# Altium PCB Prog_Adaptor.PcbDoc
Units mm, origin at the board's own origin, x right, y up, seen from the top; angles counter-clockwise.
Board outline 43.31 x 26.95 mm, 2 copper layers (Top Layer, Bottom Layer), stack 1.591 mm thick; 8 components, 10 nets, 61 pads, 28 vias.
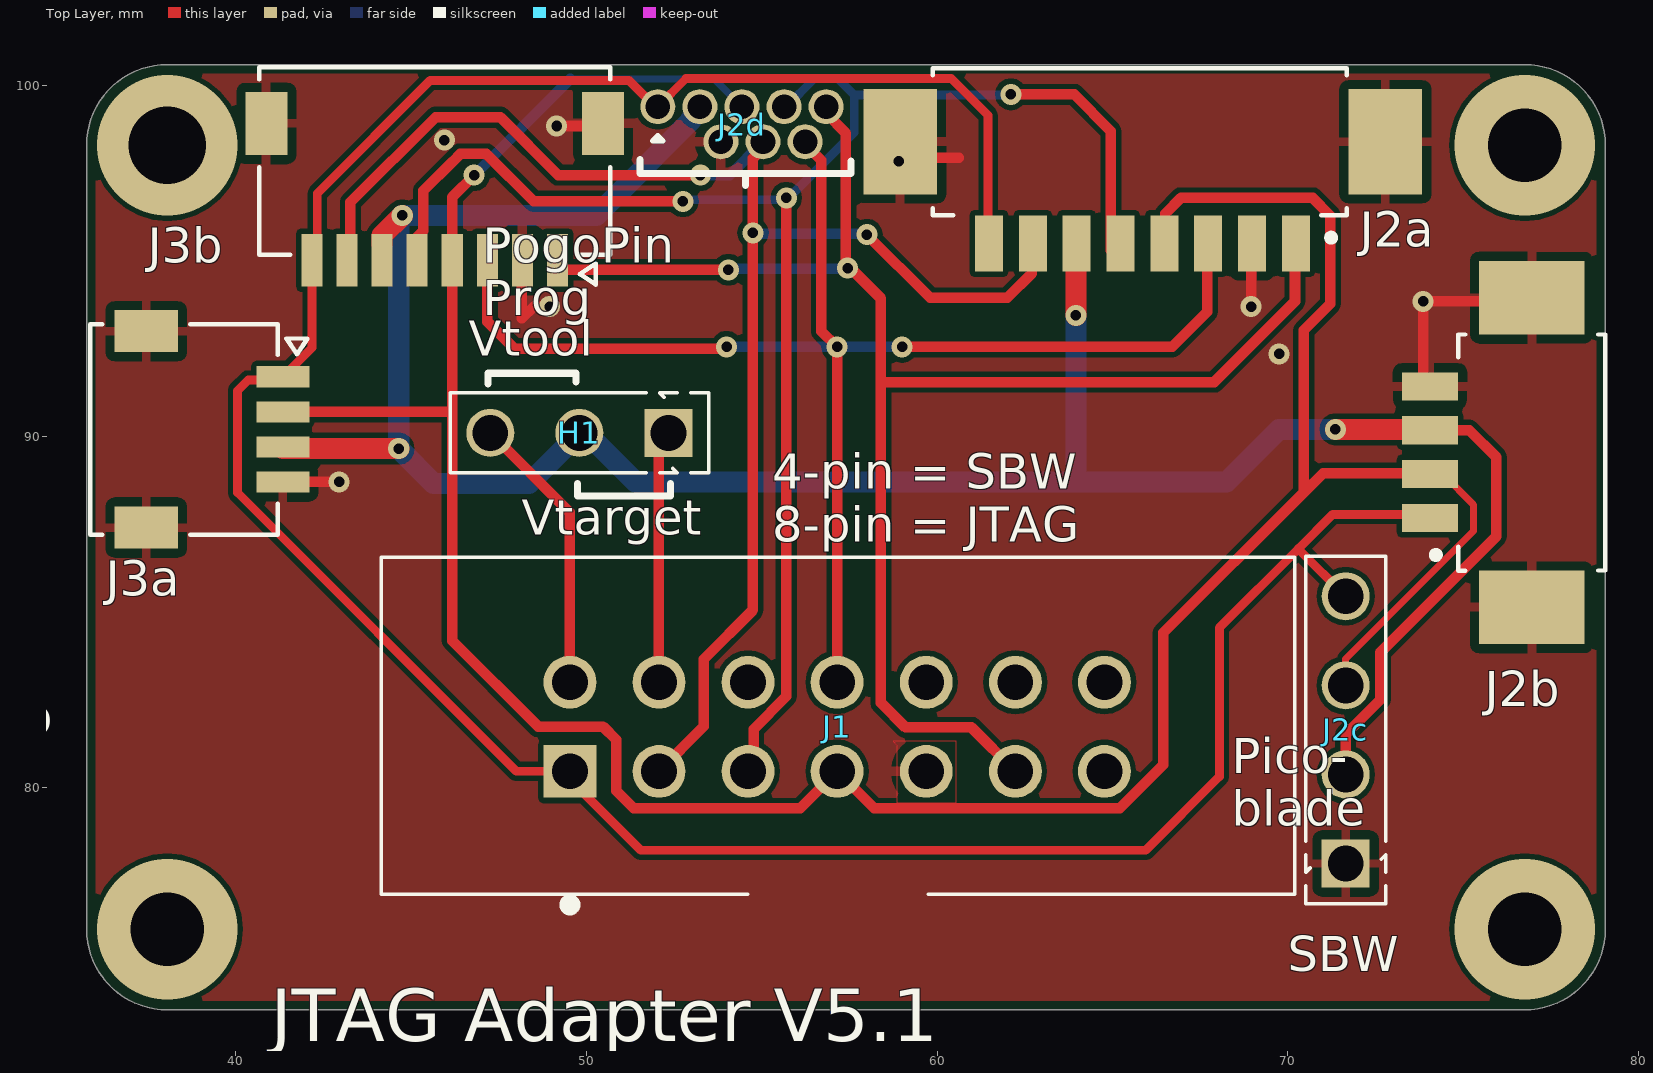
[diagram p0: Top Layer view]
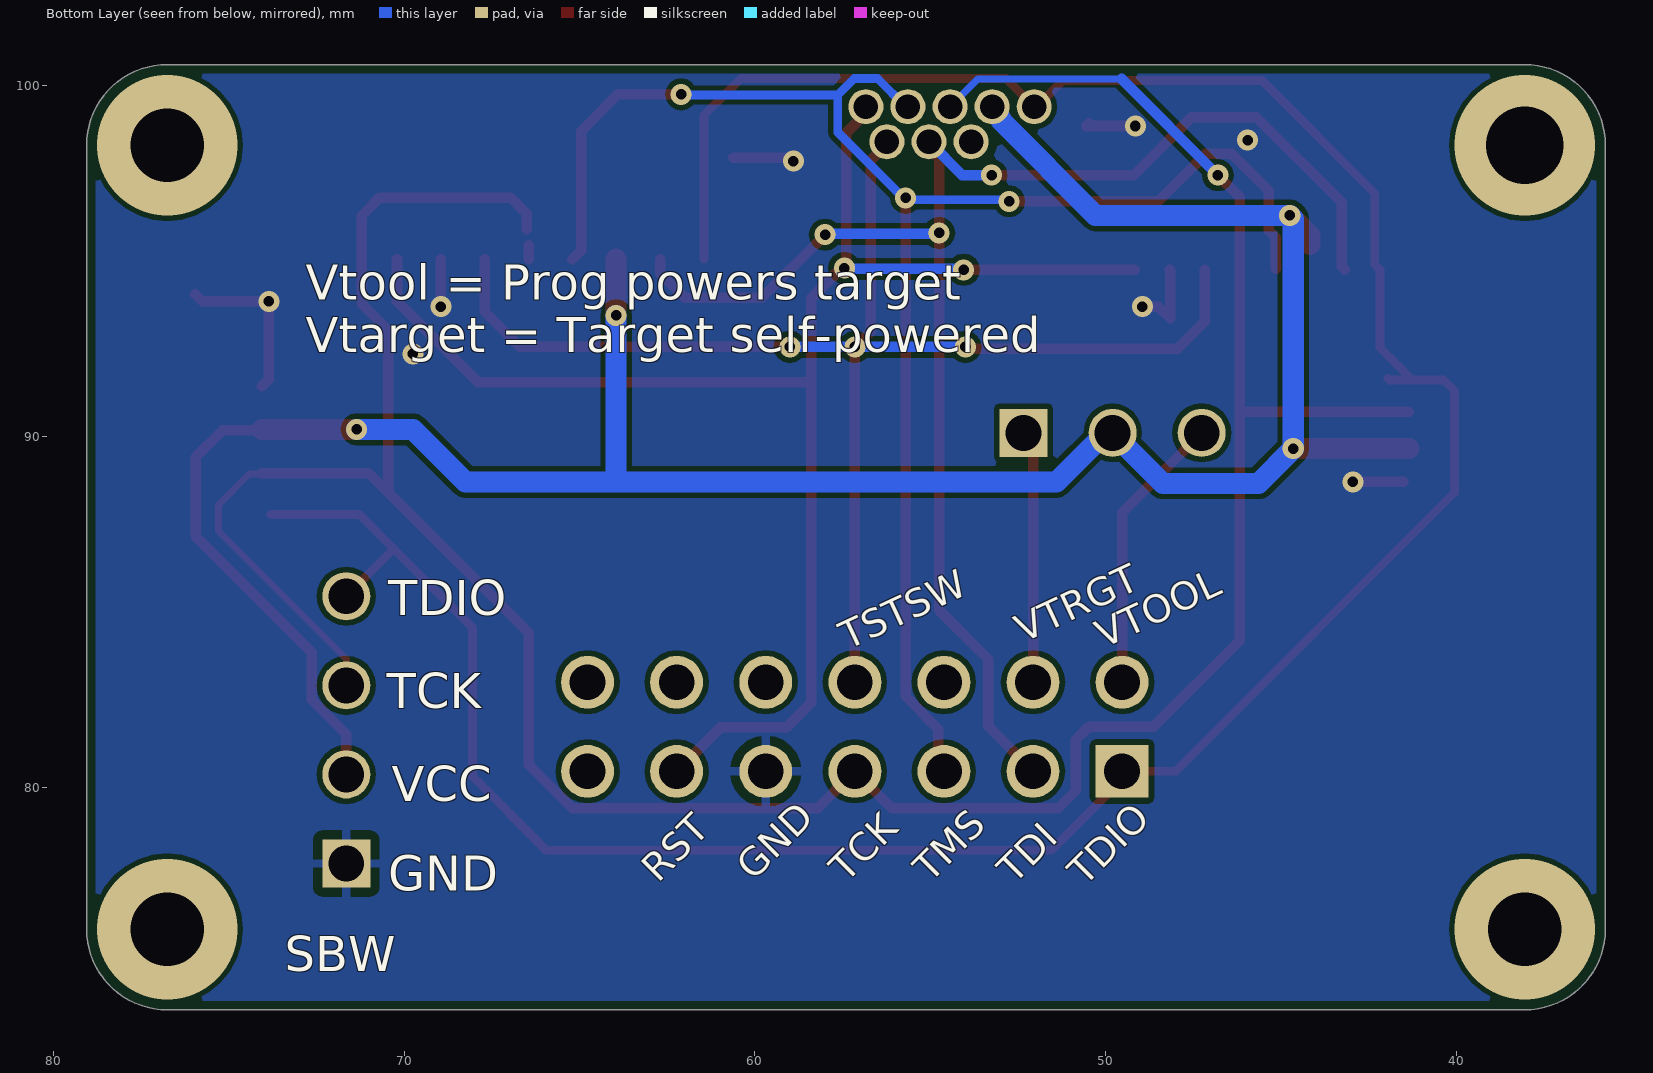
[diagram p1: Bottom Layer view, seen from below]
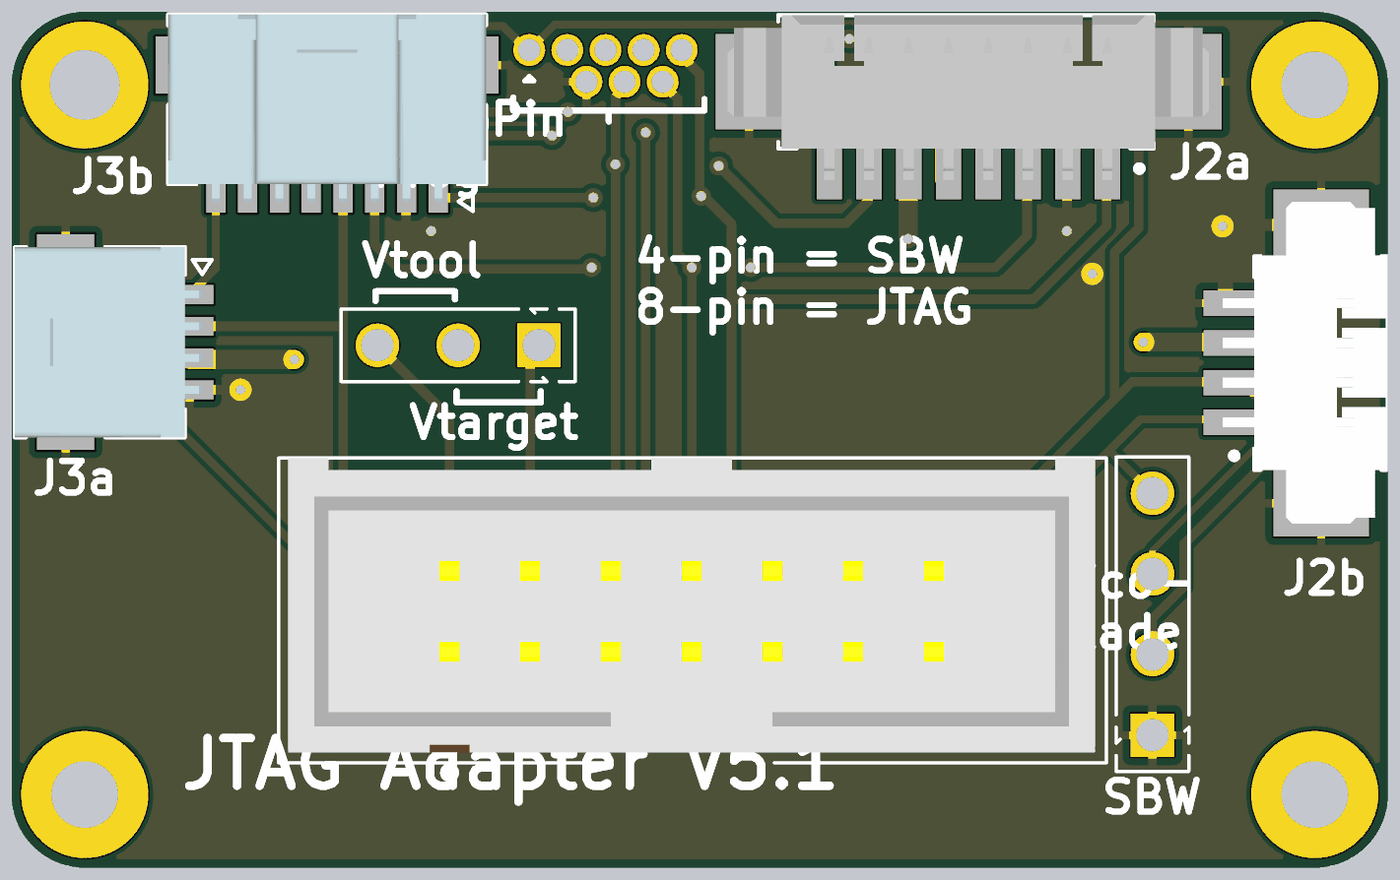
[diagram p2: 3D render of the assembled board from above, using the file's embedded part models]

## Layer stack, top to bottom
Top Solder: solder mask 0.0102, Solder Resist, Dk 3.5
Top Layer: signal copper 0.0356
Dielectric 1: dielectric 1.52, FR-4, Dk 4.8
Bottom Layer: signal copper 0.0356
Bottom Solder: solder mask 0.0102, Solder Resist, Dk 3.5

## Board outline
35.749,75.95 35.749,98.3 cw(c38.05,98.3) 38.05,100.601 76.755,100.601 cw(c76.755,98.3) 79.056,98.3 79.056,75.95 cw(c76.755,75.95) 76.755,73.649 38.05,73.649 cw(c38.05,75.95)

## Design rules (kind name [scope] priority, off if disabled: settings)
BoardOutlineClearance [All] p1: gap=0.254 ignorepadtopadclearanceinfootprint=FALSE except(0: Arc-SplitContinuation Track-SplitContinuation SMDPad-SplitContinuation THPad-SplitContinuation Via-SplitContinuation Fill-SplitContinuation Poly-SplitContinuation Region-SplitContinuation Text-SplitContinuation)
Clearance [All] p1: gap=0.152 ignorepadtopadclearanceinfootprint=FALSE except(0: Arc-Hole Track-Hole SMDPad-Hole THPad-Hole Via-Hole Fill-Hole Poly-Hole Region-Hole Text-Hole; 0.127: THPad-THPad Via-Via)
HoleSize [All] p1: absolutevalues=TRUE maxlimit=6.2 minlimit=0.3 maxpercent=80.000 minpercent=20.000
MinimumAnnularRing [All] p1: minimumring=0.15
MinimumSolderMaskSliver [All] p1: minsoldermaskwidth=0.1
PolygonConnect ViaConnect [IsVia] p1: connectstyle=Direct reliefconductorwidth=0.254 reliefentries=4 polygonreliefangle="90 Angle" airgapwidth=0.254
PolygonConnect [All] p2: connectstyle=Relief reliefconductorwidth=0.254 reliefentries=4 polygonreliefangle="90 Angle" airgapwidth=0.254
RoutingVias [All] p1: holewidth=0.3 width=0.6 viastyle="Through Hole" minholewidth=0.3 minwidth=0.5 maxholewidth=1 maxwidth=5
SilkToSilkClearance [All] p1: silktosilkclearance=0.1
SilkToSolderMaskClearance [IsPad] p1: minsilkscreentomaskgap=0.1 clearancetoexposedcopper=TRUE
SolderMaskExpansion [All] p1: expansion=0.051
SupplyNets "Schematic Supply Nets_1" [InNet('GND')] p1: voltage=0.000
SupplyNets "Schematic Supply Nets" [InNet('3v3')] p2: voltage=0.000
Width [All] p1: maxlimit=25.4 minlimit=0.15 preferedwidth=0.3
26 further rules are at their usual default settings.

## Components (designator, comment, footprint, x,y, rotation, side; value= is the part's Value field where it differs from the comment)
H1 "HDR,2.54mm,1x3" HEADER_2.54MM_1x3PIN 49.8,90.1 r180 top
J1 "SBH11-PBPC-D07-ST-BK" SBH11-PBPC-D07-ST-BK 57.15,81.72 r0 top
J2a "0532610871" MOLEX_0532610871 65.855,98.4 r180 top
J2b "0532610471" MOLEX_0532610471 76.955,89.55 r90 top
J2c "HDR,2.54mm,1x4" HEADER_2.54MM_1x4PIN 71.65,81.63 r90 top
J2d "Headerless Pogo Holes 8-pin" POGO_8_PIN_HEADER 54.436,98.9 r0 top
J3a "5015680407" MOLEX_5015680407 38.8,90.2 r270 top
J3b "5015680807" MOLEX_5015680807 45.675,97.575 r180 top

## Footprints (in the part's own frame and the unit in brackets; to place one, negate y for a bottom-side part, rotate by r counter-clockwise, add the part's x,y. Pads: shape width x height; smd on the part's side, far side on the other; paste and mask are expansions set on the pad)
HEADER_2.54MM_1x3PIN [mm]
  rect 1.37x1.37 hole 1.02: 1(-2.54,0)
  round 1.37 hole 1.02: 2(0,0) 3(2.54,0)
  silkscreen extent -3.68,-1.14 3.68,1.14, body extent -3.68,-1.14 3.68,1.14, height 8.2
HEADER_2.54MM_1x4PIN [mm]
  rect 1.37x1.37 hole 1.02: 1(-3.81,0)
  round 1.37 hole 1.02: 2(-1.27,0) 3(1.27,0) 4(3.81,0)
  silkscreen extent -4.95,-1.14 4.95,1.14, body extent -4.95,-1.14 4.95,1.14, height 8.2
MOLEX_0532610471 [mm] "Header - Picoblade 04-pin, SMT, RA, 3.4mm height"
  rect 0.8x1.6 smd mask+0.051: 1(-1.875,2.9) 2(-0.625,2.9) 3(0.625,2.9) 4(1.875,2.9)
  rect 2.1x3 smd mask+0.051: MP1(-4.425,0) MP2(4.405,0)
  silkscreen extent -3.38,-2.1 3.35,2.83, body extent -5.07,-2.1 5.07,3.1, height 3.4
MOLEX_0532610871 [mm] "Header - Picoblade 08-pin, SMT, RA, 3.4mm height"
  rect 0.8x1.6 smd mask+0.051: 1(-4.375,2.9) 2(-3.125,2.9) 3(-1.875,2.9) 4(-0.625,2.9) 5(0.625,2.9) 6(1.875,2.9) 7(3.125,2.9) 8(4.375,2.9)
  rect 2.1x3 smd mask+0.051: MP1(-6.925,0) MP2(6.905,0)
  silkscreen extent -5.83,-2.1 5.98,2.83, body extent -7.57,-2.1 7.58,3.1, height 3.42
MOLEX_5015680407 [mm] "Header - Picoclasp 04-pin, SMT, RA, 3.2mm height"
  rect 0.6x1.5 smd mask+0.076: 1(-1.5,2.55) 2(-0.5,2.55) 3(0.5,2.55) 4(1.5,2.55)
  rect 1.2x1.8 smd mask+0.076: MP1(2.8,-1.35) MP2(-2.8,-1.35)
  silkscreen extent -3,-2.95 3,3.25, body extent -3,-2.95 3,2.95, height 3.19
MOLEX_5015680807 [mm] "Header - Picoclasp 08-pin, SMT, RA, 4.75mm height"
  rect 0.6x1.5 smd mask+0.076: 1(-3.5,2.55) 2(-2.5,2.55) 3(-1.5,2.55) 4(-0.5,2.55) 5(0.5,2.55) 6(1.5,2.55) 7(2.5,2.55) 8(3.5,2.55)
  rect 1.2x1.8 smd mask+0.076: MP1(4.8,-1.35) MP2(-4.8,-1.35)
  silkscreen extent -5,-2.95 5,3.25, body extent -5,-2.95 5,2.95, height 4.71
POGO_8_PIN_HEADER [mm] "8-pin header for pogo pins"
  round 1 hole 0.7 mask+0.051: 1(-2.4,0.5) 2(-1.2,0.5) 3(-0.6,-0.5) 4(0,0.5) 5(0.6,-0.5) 6(1.2,0.5) 7(1.8,-0.5) 8(2.4,0.5)
  silkscreen extent -2.55,-0.47 -2.25,-0.32
SBH11-PBPC-D07-ST-BK [mm]
  rect 1.508x1.508 hole 1.02: 01(-7.62,-1.27)
  round 1.508 hole 1.02: 02(-7.62,1.27) 03(-5.08,-1.27) 04(-5.08,1.27) 05(-2.54,-1.27) 06(-2.54,1.27) 07(0,-1.27) 08(0,1.27) 09(2.54,-1.27) 10(2.54,1.27) 11(5.08,-1.27) 12(5.08,1.27) 13(7.62,-1.27) 14(7.62,1.27)
  silkscreen extent -7.72,-5.18 -7.52,-4.98, body extent -12.7,-4.44 12.7,4.83, height 8.89

## Part data
H1: "Connector - 2.54mm, 1x3-pin"
J1: "14-pin JTAG Male Header"
J2a: "Header - Picoblade 08-pin, SMT, RA", Supplier 1 Part No.=WM7626CT-ND, MF Part No.=0532610871, Mounting Type="Surface Mount", Orientation="Right Angle", Pins=8, Pitch=1.25mm, Supplier 1=Digikey
J2b: "Header - Picoblade 04-pin, SMT, RA", Supplier 1 Part No.=WM7622CT-ND, MF Part No.=0532610471, Mounting Type="Surface Mount", Orientation="Right Angle", Pins=4, Pitch=1.25mm, Supplier 1=Digikey
J2c: "Connector - 2.54mm, 1x4-pin"
J2d: "Connector - Pogo pin pads, JTAG"
J3a: "Connector - Picoclasp  04-pin, SMT, RA", Supplier 1 Part No.=WM7895CT-ND, APSS Standard Part="APSS Standard", MF Part No.=5015680407, Mounting Type="Surface Mount", Orientation=Straight, Pins=4, Pitch=1mm, Supplier 1=Digikey
J3b: "Connector - Picoclasp  08-pin, SMT, RA", APSS Standard Part="APSS Standard", MF Part No.=5015680807, Mounting Type="Surface Mount", Orientation=Straight, Pins=8, Pitch=1mm, Supplier 1=Digikey

## Via types
v1: diameter 0.6, hole 0.3, Top Layer to Bottom Layer, tented both sides, 14 vias
v2: diameter 0.6, hole 0.3, Top Layer to Bottom Layer, 10 vias
v3: diameter 4, hole 2.1, Top Layer to Bottom Layer, 3 vias
v4: diameter 4, hole 2.2, Top Layer to Bottom Layer, 1 vias

## Nets (pads, with @x,y where several pads share a name; then routed paths per layer and width w, separated by ;. In a path a pad name is that pad's centre, name@x,y a point inside that pad or via, vN(x,y) a via of type N, cw(c..) or ccw(c..) an arc to the next point about the centre after c; other vN are vias at no path point)
3v3: H1.2 J2a.6 J2b.3 J2c.2 J2d.2 J3a.3 J3b.6 | length 73
  Top Layer w0.3: J2c.2 71.65,81.504 72.637,82.491 72.637,83.837 75.95,87.15 75.95,89.4 75.175,90.175 J2b.3
  Top Layer w0.6: J3a.3@41.35,89.65 v2(44.65,89.65) ; J3b.6@44.175,95.475 44.175,95.725 v2(44.75,96.3) ; v1(63.955,93.45) J2a.6@63.955,95.05 ; v2(71.355,90.2) J2b.3@74.055,90.2
  Bottom Layer w0.6: H1.2 48.363,88.663 45.637,88.663 v2(44.65,89.65) 44.65,96.2 v2(44.75,96.3) 50.283,96.3 52.988,99.006 52.988,99.044 53.236,99.292 J2d.2 ; H1.2@50.3,89.8 51.4,88.7 65.65,88.7 ; v1(63.955,93.45) 63.955,88.7 68.255,88.7 69.755,90.2 v2(71.355,90.2)
GND: J1.09 J2a.2 J2a.MP1 J2a.MP2 J2b.4 J2b.MP1 J2b.MP2 J2c.1 J2d.3 J3a.4 J3a.MP1 J3a.MP2 J3b.2 J3b.MP1 J3b.MP2 | length 13.1
  Top Layer w0.3: J3a.4@41.511,88.7 v2(42.95,88.7) ; J3b.2@48.175,94.75 48.162,94.737 48.162,93.363 48.5,93.7 v1(48.95,93.7) ; v2(49.15,98.85) 50.55,98.85 J3b.MP2 ; v2(58.9,97.85) 58.981,97.85 59.081,97.95 60.62,97.95 ; v1(68.955,93.7) J2a.2@68.955,95.05 ; J2b.4 73.855,91.625 v2(73.855,93.85) 75.75,93.85 J2b.MP2@75.955,94.055
  other v2: 69.755,92.35 45.95,98.45
JTAG_TCK/SBW_TCK: J1.07 J2a.4 J2b.2 J2c.3 J2d.4 J3a.2 J3b.4 | length 88.3
  Top Layer w0.2: J2c.3 71.65,83.65 75.3,87.3 75.3,88.05 74.425,88.925 J2b.2
  Top Layer w0.3: J3a.2 46.125,90.7 46.175,90.65 ; J3b.4 46.175,96.825 v2(46.8,97.45) ; J3b.4@46.175,95.503 46.175,90.65 ; J2d.4@54.436,99.26 J2d.4 ; J2a.4@66.455,95.05 J2a.4@66.455,95.45 ; J2a.4@66.505,95.9 66.505,96.35 66.955,96.8 70.705,96.8 71.216,96.289 71.216,93.785 70.455,93.024 70.455,88.4 ; J2b.2@74.055,88.95 71.005,88.95 70.455,88.4 ; 46.175,90.65 46.175,84.175 48.623,81.727 50.473,81.727 50.85,81.35 50.85,79.9 51.356,79.394 56.094,79.394 J1.07 58.206,79.394 65.208,79.394 66.45,80.636 66.45,84.395 70.455,88.4
  Bottom Layer w0.2: 49.547,100.197 53.639,100.197 J2d.4
  Bottom Layer w0.3: v2(46.8,97.45) 49.547,100.197
JTAG_TDI: J1.03 J2a.7 J2d.5 J3b.7 | length 44.4
  Top Layer w0.3: J3b.7@43.175,94.75 43.27,94.845 43.27,96.67 45.7,99.1 47.55,99.1 49.2,97.45 v1(53.25,97.45) v1@53.248,97.448 ; J1.03 53.35,81.73 53.35,83.65 54.75,85.05 v1(54.75,95.8) 54.75,97.925 55.036,98.211 J2d.5 ; v1(58,95.75) 59.802,93.948 62.003,93.948 62.705,94.65 J2a.7@62.705,95.05
  Bottom Layer w0.3: v1(53.25,97.45) 54.086,97.45 J2d.5 ; v1(54.75,95.8) 54.775,95.775 57.975,95.775 v1(58,95.75)
JTAG_TDO/SBW_TDIO: J1.01 J2a.8 J2b.1 J2c.4 J2d.1 J3a.1 J3b.8 | length 82.8
  Top Layer w0.25: J3a.1 42.175,92.525 42.175,94.75 42.325,94.9 42.325,96.925 45.55,100.15 51.213,100.15 51.963,99.4 J2d.1 52.838,100.202 60.403,100.202 61.455,99.15 J2a.8@61.455,95.05 ; J3a.1@41.95,91.65 41.907,91.607 40.357,91.607 40.05,91.3 40.05,88.4 48,80.45 J1.01 49.415,80.335 51.55,78.2 65.95,78.2 68.05,80.3 68.05,84.545 70.305,86.8 ; J2c.4 70.305,86.785 70.305,86.8 ; J2b.1@73.805,87.775 71.28,87.775 70.305,86.8
JTAG_TEST: J1.08 J2a.3 J2d.7 J3b.3 | length 40
  Top Layer w0.3: J3b.3@47.175,94.75 47.175,93.275 47.95,92.5 53.95,92.5 v1(54,92.55) ; J2d.7 56.236,98.338 56.7,97.874 56.7,93 v1(57.15,92.55) J1.08 ; v1(59.002,92.55) 66.705,92.55 67.705,93.55 J2a.3@67.705,95.05
  Bottom Layer w0.3: v1(54,92.55) v1(57.15,92.55) v1(59.002,92.55)
JTAG_TMS: J1.05 J2a.5 J2d.6 J3b.5 | length 48.3
  Top Layer w0.3: J3b.5@45.151,94.774 45.151,95.663 45.352,95.865 45.352,97.002 46.198,97.848 46.2,97.848 46.404,98.052 47.148,98.052 48.498,96.702 v1(52.75,96.702) ; J1.05 54.768,80.608 54.768,81.654 55.7,82.586 v1(55.7,96.8) ; v1(62.105,99.75) 63.905,99.75 64.955,98.7 64.955,95.3 J2a.5@65.205,95.05
  Bottom Layer w0.25: v1(52.75,96.702) 52.798,96.75 55.65,96.75 v1(55.7,96.8) 55.771,96.8 57.638,98.668 57.638,99.732 ; J2d.6 55.701,99.4 56.504,100.202 57.168,100.202 57.638,99.732 ; v1(62.105,99.75) 62.087,99.732 57.638,99.732
Reset: J1.11 J2a.1 J2d.8 J3b.1 | length 44.6
  Top Layer w0.3: J3b.1@49.175,94.75 v1(54.05,94.75) ; J2d.8 56.836,99.211 57.398,98.649 57.398,94.852 v1(57.45,94.8) 57.531,94.8 58.4,93.931 58.4,91.55 ; J1.11 60.98,81.7 59.1,81.7 58.4,82.4 58.4,91.55 ; J2a.1@70.205,95.05 70.205,93.85 67.905,91.55 58.4,91.55
  Bottom Layer w0.3: v1(54.05,94.75) 54.075,94.775 57.425,94.775 v1(57.45,94.8)
VccTarget: H1.1 J1.04 | length 7.2
  Top Layer w0.3: J1.04 52.07,89.83 H1.1
VccTool: H1.3 J1.02 | length 8.1
  Top Layer w0.3: H1.3 49.53,87.83 J1.02
pads on no net: J1.06 J1.10 J1.12 J1.13 J1.14
copper on no net:
  other v3: 38.05,75.95 76.755,75.95 76.755,98.3
  other v4: 38.05,98.3

## Polygon pours and split planes (outlines as drawn)
GND on Top Layer "GND" (solid, remove dead copper, pour order 4): 35.749,100.599 35.749,73.6 79.056,73.6 79.056,100.6
GND on Top Layer "GND_L01_P000" (solid, pour order 0): 60.55,79.55 60.55,81.3 58.75,81.3 58.85,81.2 58.85,79.55
GND on Bottom Layer "GND" (solid, remove dead copper, pour order 8): 34.946,100.6 34.946,73.6 80.8,73.6 80.8,100.6

## Silkscreen, mask and mechanical layers (free items; w line width, h text height)
Top Overlay:
  lines w0.1: 54.6,76.95 54.3,76.95 44.15,76.95 44.15,86.55 70.2,86.55 70.2,76.95 59.75,76.95
  lines w0.2: 47.2,91.5 47.2,91.8 49.7,91.8 49.7,91.55 ; 49.75,88.65 49.75,88.3 52.4,88.3 52.4,88.65 ; 51.533,97.9 51.533,97.5 57.55,97.5 57.55,97.85 ; 54.541,97.15 54.541,97.5
  text "PogoPin  / Prog" at 47.05,93.45 h1
  text "Vtool" at 46.65,92.3 h1
  text "Vtarget" at 48.15,87.2 h1
  text "4-pin = SBW / 8-pin = JTAG" at 55.3,87 h1
  text "Pico- / clasp" at 31.2,81.5 h1
  text "Pico- / blade" at 68.4,78.9 h1
  text "SBW" at 70,74.75 h1
  text "JTAG Adapter V5.1" at 41,72.75 h1.5
Bottom Overlay:
  text "Vtool = Prog powers target / Vtarget = Target self-powered" at 72.8,92.4 h1
  text "TDIO" at 70.45,84.9 h1
  text "VTRGT" at 52.35,84.1 h0.8 r335
  text "VTOOL" at 50.05,83.95 h0.8 r335
  text "TSTSW" at 57.35,83.9 h0.8 r335
  text "TCK" at 70.5,82.25 h1
  text "VCC" at 70.35,79.6 h1
  text "GND" at 60.05,77.3 h0.8 r315
  text "TMS" at 55,77.25 h0.8 r315
  text "TCK" at 57.4,77.25 h0.8 r315
  text "RST" at 62.75,77.25 h0.8 r315
  text "TDI" at 52.6,77.2 h0.8 r315
  text "TDIO" at 50.6,77.15 h0.8 r315
  text "GND" at 70.45,77.05 h1
  text "SBW" at 73.4,74.75 h1
3D Models:
  lines w0.05: 45.2,77.275 45.225,77.25
Board Outline:
  the board outline again, w0.25